# Altium PCB MainBoard.PcbDoc
Units mil, origin at the board's own origin, x right, y up, seen from the top; angles counter-clockwise.
Board outline 2226.59 x 2228.35 mil, 2 copper layers (Top Layer, Bottom Layer); 27 components, 34 nets, 217 pads, 0 vias.
Unrouted connection lines stored in the file: 60.
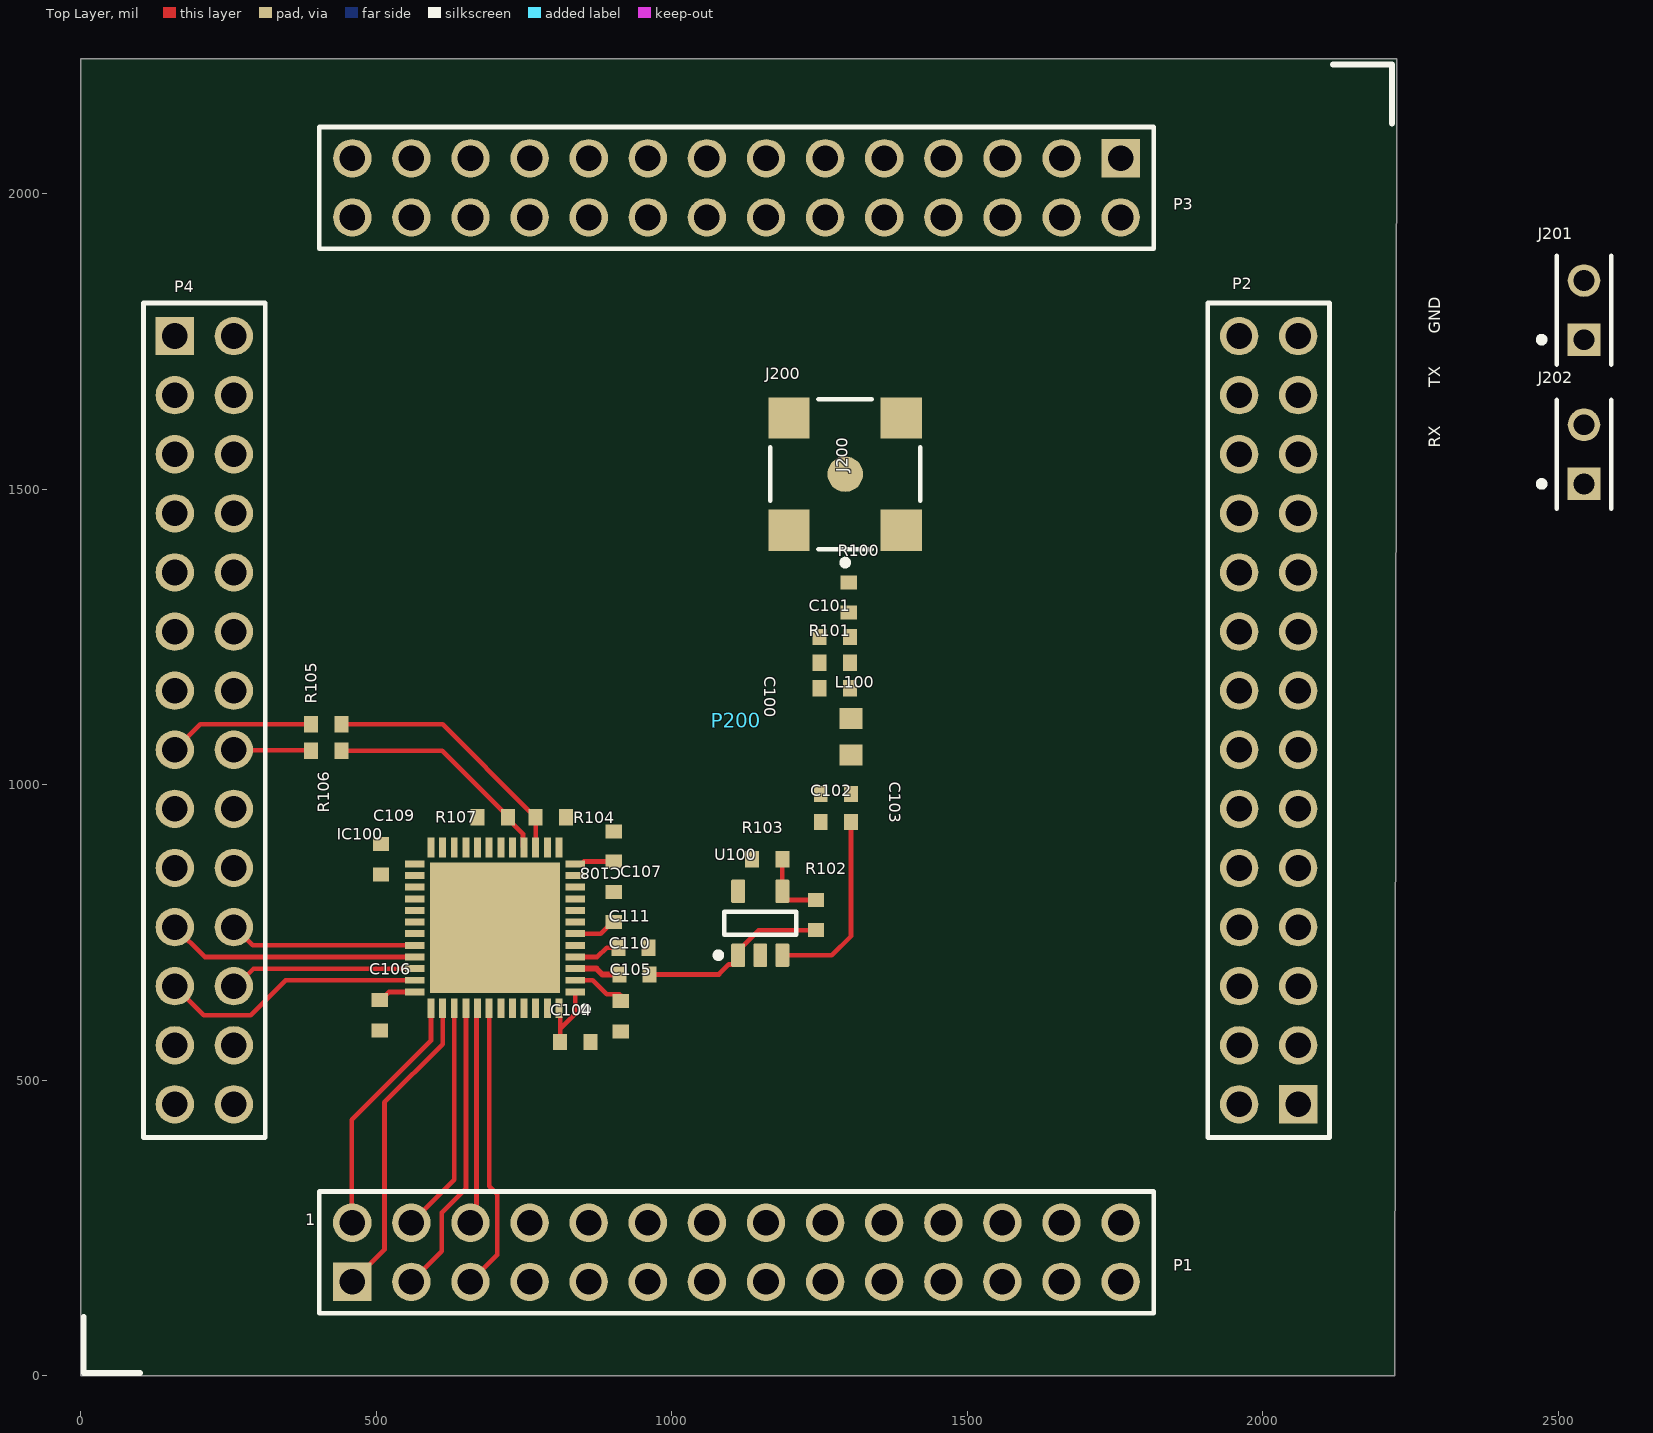
[diagram p0: Top Layer view]
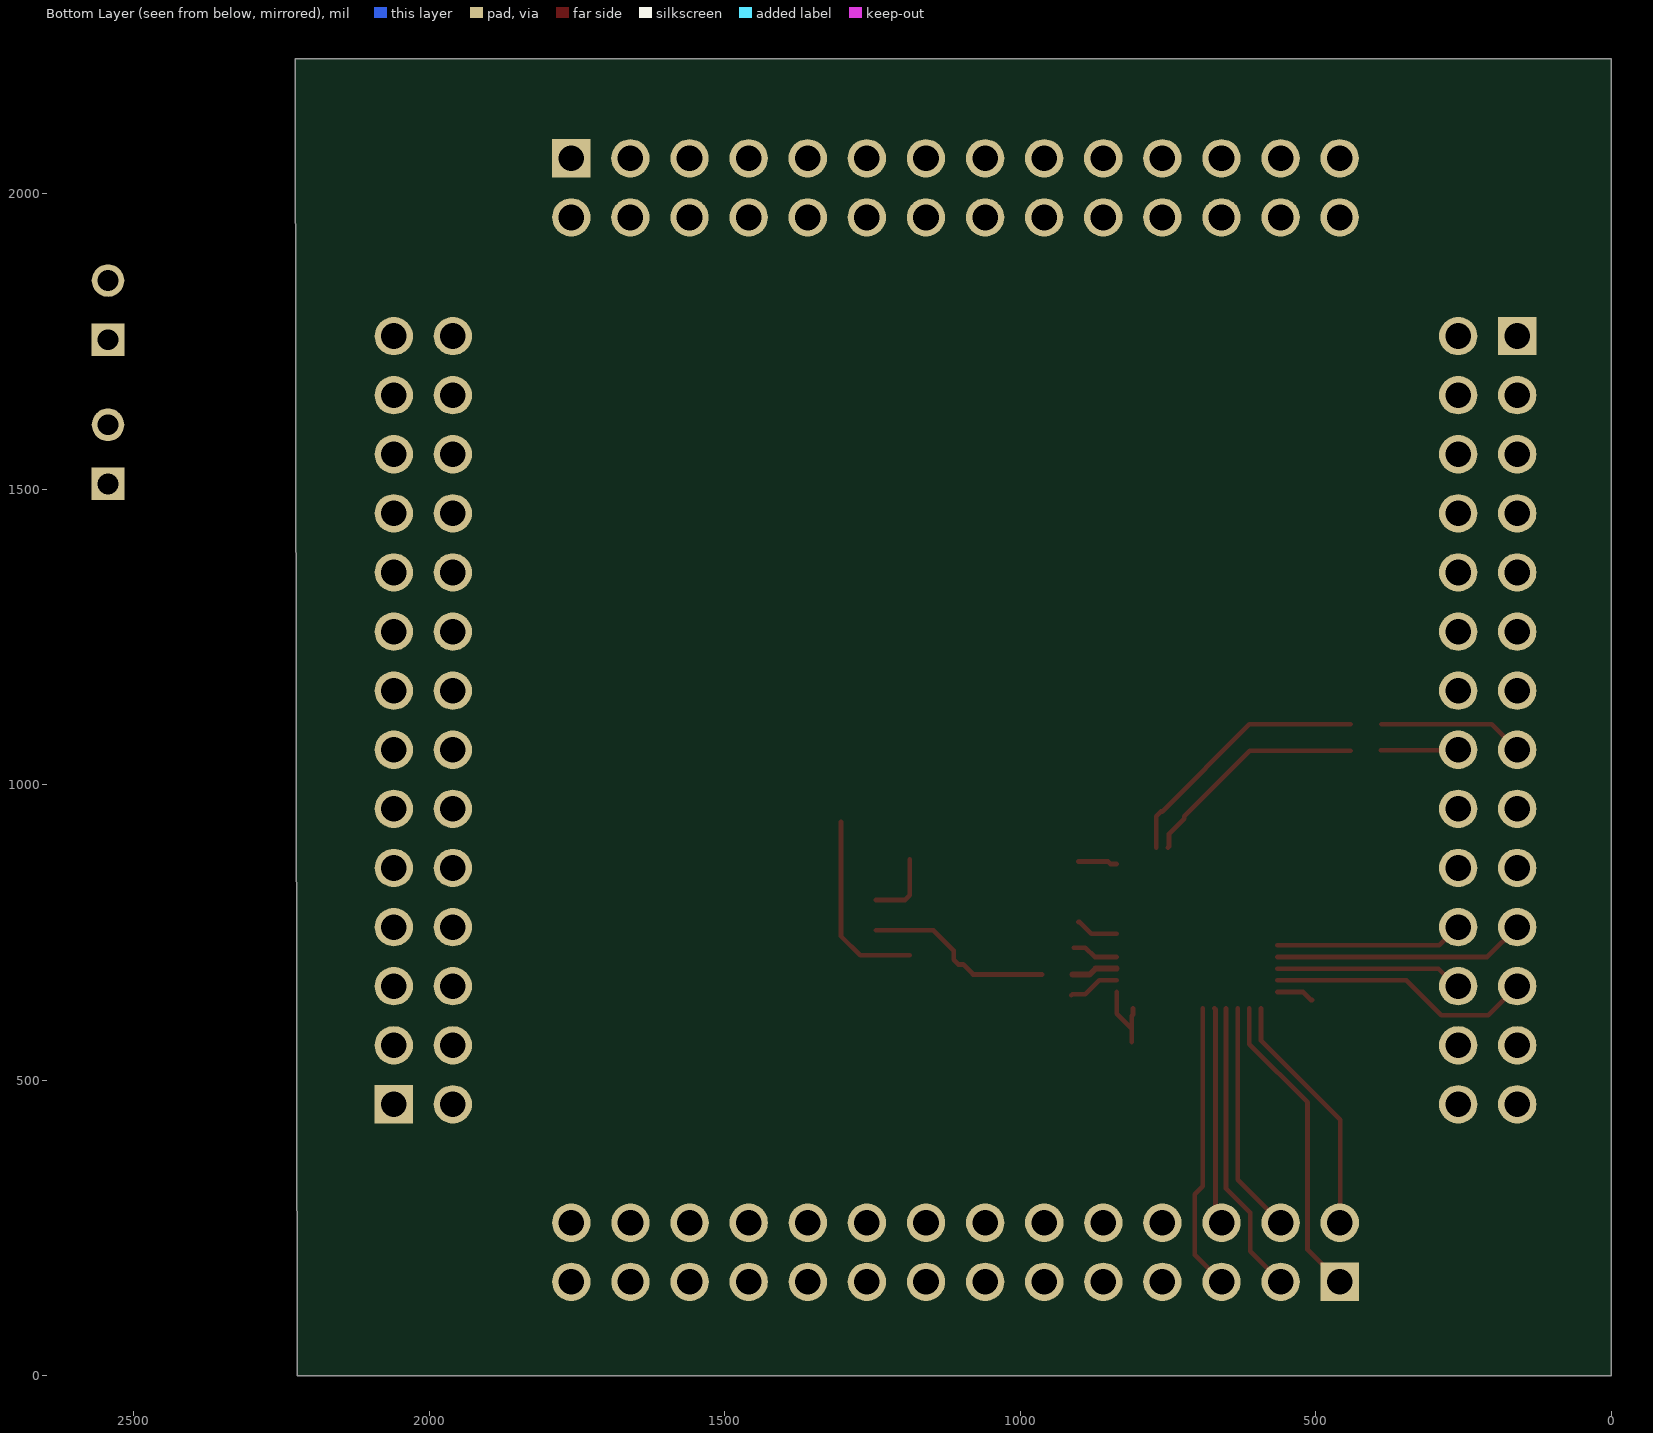
[diagram p1: Bottom Layer view, seen from below]

## Layer stack, top to bottom
Top Solder: solder mask 0.4, Solder Resist, Dk 3.5
Top Layer: signal copper 1.4
Dielectric 1: dielectric 12.6, FR-4, Dk 4.8
Bottom Layer: signal copper 1.4
Bottom Solder: solder mask 0.4, Solder Resist, Dk 3.5

## Board outline
0,0 2222.88,0 2226.59,2228.35 0,2228.35

## Design rules (kind name [scope] priority, off if disabled: settings)
Clearance [All] p1: gap=1 ignorepadtopadclearanceinfootprint=FALSE except(0: Arc-Hole Track-Hole SMDPad-Hole THPad-Hole Via-Hole Fill-Hole Poly-Hole Region-Hole Text-Hole)
MatchedLengths [InNetClass('BIT579')] p1: tolerance=3.94 checknetsindiffpair=FALSE checkdiffpairvsdiffpair=TRUE checkxsignals=TRUE checkothers=TRUE
PolygonConnect [All] p1: connectstyle=Direct reliefconductorwidth=10 reliefentries=4 polygonreliefangle="90 Angle" airgapwidth=10
RoomDefinition Computation [InComponentClass('Computation')] p1: confinementstyle=ConfineIn formatcopy=TRUE lockcomponents=FALSE outline 6045,-627.5 7780,-627.5 7780,1032.5 6045,1032.5
RoutingVias [All] p1: holewidth=28 width=50 viastyle="Through Hole" minholewidth=28 minwidth=50 maxholewidth=28 maxwidth=50
SolderMaskExpansion [All] p1: expansion=4 istentingtop=FALSE
Width [All] p1: maxlimit=100 minlimit=1 preferedwidth=10
30 further rules are at their usual default settings.

## Classes and differential pairs
net class BIT02: ADC_BIT_0 ADC_BIT_2 NetP200_18 NetP200_20
component class Connectors: J200 J201 J202 P200
net class BIT579: ADC_BIT_5 ADC_BIT_7 ADC_BIT_9
net class BIT468: ADC_BIT_4 ADC_BIT_6 ADC_BIT_8
net class BIT13: ADC_BIT_1 ADC_BIT_3
component class Computation: C100 C101 C102 C103 C104 C105 C106 C107 C108 C109 C110 C111 IC100 L100 R100 R101 R102 R103 R104 R105 R106 R107 U100

## Components (designator, comment, footprint, x,y, rotation, side; value= is the part's Value field where it differs from the comment)
C100 "0402 capacitor" 0402_FOOTPRINT 1250,1163.39 r0 top
C101 "0402 capacitor" 0402_FOOTPRINT 1250,1250 r0 top
C102 "0402 capacitor" 0402_FOOTPRINT 1251.97,937.01 r0 top
C103 "0402 capacitor" 0402_FOOTPRINT 1251.97,984.25 r0 top
C104 "0402 capacitor" 0402_FOOTPRINT 862.2,564.96 r180 top
C105 "0402 capacitor" 0402_FOOTPRINT 913.39,633.86 r270 top
C106 "0402 capacitor" 0402_FOOTPRINT 505.91,584.65 r90 top
C107 "0402 capacitor" 0402_FOOTPRINT 901.57,818.9 r270 top
C108 "0402 capacitor" 0402_FOOTPRINT 901.57,921.26 r270 top
C109 "0402 capacitor" 0402_FOOTPRINT 507.87,899.61 r270 top
C110 "0402 capacitor" 0402_FOOTPRINT 911.42,679.13 r0 top
C111 "0402 capacitor" 0402_FOOTPRINT 960.63,724.41 r180 top
IC100 "MAX19516ETM+" QFN50P700X700X80-49N 700.79,757.87 r180 top
J200 "73251-1350" FP-73251-1350-MFG 1293.31,1525.59 r90 top
J201 "5-146280-2" TECO-5-146280-2_V 2543.31,1803.14 r90 top
J202 "5-146280-2" TECO-5-146280-2_V 2543.31,1559.05 r90 top
L100 "AIML-0603-8R2K-T" INDC1608X95N 1303.15,1081.3 r270 top
P200 "FPGA_Shield_headers" FPGA_SHIELD_HEADER_FOOTPRINT 0,0 r0 top locked
R100 "0402" 0402_FOOTPRINT 1299.21,1342.52 r270 top
R101 "0402" 0402_FOOTPRINT 1250,1206.69 r0 top
R102 "0402" 0402_FOOTPRINT 1244.09,805.12 r270 top
R103 "0402" 0402_FOOTPRINT 1135.83,874.02 r0 top
R104 "0402" 0402_FOOTPRINT 769.68,944.88 r0 top
R105 "0402" 0402_FOOTPRINT 389.76,1102.36 r0 top
R106 "0402" 0402_FOOTPRINT 440.94,1057.8 r180 top
R107 "0402" 0402_FOOTPRINT 722.44,944.88 r180 top
U100 "LMH6645MF/NOPB" DBV0005A_N 1149.61,765.75 r90 top

## Footprints (in the part's own frame and the unit in brackets; to place one, negate y for a bottom-side part, rotate by r counter-clockwise, add the part's x,y. Pads: shape width x height; smd on the part's side, far side on the other; paste and mask are expansions set on the pad)
0402_FOOTPRINT [mm]
  rect 0.6x0.7 smd: 1(0,0) 2(1.3,0)
DBV0005A_N [mm] "SOT23, 5-Leads, Body 3.05x1.75mm, Pitch 0.95mm, IPC Medium Density"
  rrect17% 1x0.6 smd: 1(-1.375,0.95) 2(-1.375,0) 3(-1.375,-0.95) 4(1.375,-0.95) 5(1.375,0.95)
  silkscreen extent -1.5,-1.55 0.5,1.92, body extent -1.42,-1.46 1.42,1.46, height 1.08
FP-73251-1350-MFG [mil]
  round 60 smd paste+0 mask+0: 1(0,0)
  rect 70x70 smd paste+0 mask+0: 2(-95,95) 3(95,95) 4(-95,-95) 5(95,-95)
  silkscreen extent -155,-127 127,127, body extent -134,-134 134,134, height 10
FPGA_SHIELD_HEADER_FOOTPRINT [mm]
  rect 1.65x1.65 hole 1.1: 1(4.04,44.685) 56(44.689,52.321) 84(52.318,11.665) 85(11.666,4.04)
  round 1.65 hole 1.1: 2(6.58,44.685) 3(4.04,42.145) 4(6.58,42.145) 5(4.04,39.605) 6(6.58,39.605) 7(4.04,37.065) 8(6.58,37.065) 9(4.04,34.525) 10(6.58,34.525) 11(4.04,31.985) 12(6.58,31.985) 13(4.04,29.445) 14(6.58,29.445) 15(4.04,26.905) 16(6.58,26.905) 17(4.04,24.365) 18(6.58,24.365) 19(4.04,21.825) 20(6.58,21.825) 21(4.04,19.285) 22(6.58,19.285) 23(4.04,16.745) 24(6.58,16.745) 25(4.04,14.205) 26(6.58,14.205) 27(4.04,11.665) 28(6.58,11.665) 29(11.669,49.781) 30(11.669,52.321) 31(14.209,49.781) 32(14.209,52.321) 33(16.749,49.781) 34(16.749,52.321) 35(19.289,49.781) 36(19.289,52.321) 37(21.829,49.781) 38(21.829,52.321) 39(24.369,49.781) 40(24.369,52.321) 41(26.909,49.781) 42(26.909,52.321) 43(29.449,49.781) 44(29.449,52.321) 45(31.989,49.781) 46(31.989,52.321) 47(34.529,49.781) 48(34.529,52.321) 49(37.069,49.781) 50(37.069,52.321) 51(39.609,49.781) 52(39.609,52.321) 53(42.149,49.781) 54(42.149,52.321) 55(44.689,49.781) 57(49.778,44.685) 58(52.318,44.685) 59(49.778,42.145) 60(52.318,42.145) 61(49.778,39.605) 62(52.318,39.605) 63(49.778,37.065) 64(52.318,37.065) 65(49.778,34.525) 66(52.318,34.525) 67(49.778,31.985) 68(52.318,31.985) 69(49.778,29.445) 70(52.318,29.445) 71(49.778,26.905) 72(52.318,26.905) 73(49.778,24.365) 74(52.318,24.365) 75(49.778,21.825) 76(52.318,21.825) 77(49.778,19.285) 78(52.318,19.285) 79(49.778,16.745) 80(52.318,16.745) 81(49.778,14.205) 82(52.318,14.205) 83(49.778,11.665) 86(11.666,6.58) 87(14.206,4.04) 88(14.206,6.58) 89(16.746,4.04) 90(16.746,6.58) 91(19.286,4.04) 92(19.286,6.58) 93(21.826,4.04) 94(21.826,6.58) 95(24.366,4.04) 96(24.366,6.58) 97(26.906,4.04) 98(26.906,6.58) 99(29.446,4.04) 100(29.446,6.58) 101(31.986,4.04) 102(31.986,6.58) 103(34.526,4.04) 104(34.526,6.58) 105(37.066,4.04) 106(37.066,6.58) 107(39.606,4.04) 108(39.606,6.58) 109(42.146,4.04) 110(42.146,6.58) 111(44.686,4.04) 112(44.686,6.58)
  silkscreen extent 0.13,0.13 56.35,56.35, body extent 2.77,2.77 53.59,53.59, height 8.59
INDC1608X95N [mm]
  rect 0.9x0.97 smd: 1(-0.785,0) 2(0.785,0)
QFN50P700X700X80-49N [mm]
  rect 0.85x0.3 smd: 1(-3.45,2.75) 2(-3.45,2.25) 3(-3.45,1.75) 4(-3.45,1.25) 5(-3.45,0.75) 6(-3.45,0.25) 7(-3.45,-0.25) 8(-3.45,-0.75) 9(-3.45,-1.25) 10(-3.45,-1.75) 11(-3.45,-2.25) 12(-3.45,-2.75) 25(3.45,-2.75) 26(3.45,-2.25) 27(3.45,-1.75) 28(3.45,-1.25) 29(3.45,-0.75) 30(3.45,-0.25) 31(3.45,0.25) 32(3.45,0.75) 33(3.45,1.25) 34(3.45,1.75) 35(3.45,2.25) 36(3.45,2.75)
  rect 0.3x0.85 smd: 13(-2.75,-3.45) 14(-2.25,-3.45) 15(-1.75,-3.45) 16(-1.25,-3.45) 17(-0.75,-3.45) 18(-0.25,-3.45) 19(0.25,-3.45) 20(0.75,-3.45) 21(1.25,-3.45) 22(1.75,-3.45) 23(2.25,-3.45) 24(2.75,-3.45) 37(2.75,3.45) 38(2.25,3.45) 39(1.75,3.45) 40(1.25,3.45) 41(0.75,3.45) 42(0.25,3.45) 43(-0.25,3.45) 44(-0.75,3.45) 45(-1.25,3.45) 46(-1.75,3.45) 47(-2.25,3.45) 48(-2.75,3.45)
  rect 5.6x5.6 smd: 49(0,0)
  silkscreen extent -4,3.38 -3.75,3.62, body extent -3.55,-3.55 3.55,3.55, height 0.8
TECO-5-146280-2_V [mm] "Connector, 2-Leads, Body 4.67x2.34mm, Pitch 2.54mm"
  rect 1.4x1.4 hole 0.89: 1(-1.27,0)
  round 1.4 hole 0.89: 2(1.27,0)
  silkscreen extent -2.33,-1.17 2.33,1.94, body extent -2.34,-1.17 2.34,1.17, height 5.33

## Part data
C100 C101 C102 C103 C104 C105 C106 C107 C108 C109 C110 C111: library part Capacitor_0402
IC100: "Integrated Circuit", Manufacturer_Name="Maxim Integrated", Mouser Part Number=700-MAX19516ETM, Datasheet Link=https://datasheets.maximintegrated.com/en/ds/MAX19516.pdf, Height=0.8mm, Manufacturer_Part_Number=MAX19516ETM+, Mouser Price/Stock=https://www.mouser.co.uk/ProductDetail/Maxim-Integrated/MAX19516ETM%2b/?qs=1THa7WoU59FJ2JI%2FsSE3dA%3D%3D
J200: library part CMP-04764-000006-1, "CONN SMA JACK STR 50 OHM SMD", Frequency=18GHz, Manufacturer=Molex, Temperature="-65°C to +165°C", Temperature Range High=+165°C, Temperature Range Low=-65°C, Voltage Rating=500V, Automotive=No, Category=Conn, ComponentLink2Description=Datasheet, ComponentLink2URL=https://www.molex.com/pdm_docs/sd/732511350_sd.pdf, Conn Orientation=Straight, Contact Material=Gold, Device Class L1=Connectors, Device Class L2="RF / Coaxial Connectors", Device Class L3=unset, Digikey Description="CONN SMA JACK STR 50 OHM SMD", Footprint Url=https://forum.upverter.com/uploads/default/original/3X/d/a/daeafa2ce4908d4fc4e49f0b17d7d2c986fce444.pdf, Height=9.655mm, Impedance=50Ω, Is Female=yes, Lead Free=Yes, Manufacturer Part Number=73251-1350, Mouser Description="RF Connectors / Coaxial Connectors SMA ST PCB-JCK STD SMT", Number of Contacts=1, Octopart=https://octopart.com/73251-1350-molex-5414390, Package=73251-1350, RoHS=TRUE, Shielding=true, Standoff Height=0.41mm
J201 J202: library part CMP-2000-07492-1, "Male Header, Pitch 2.54 mm, 1 x 2 Position, Height 8.21 mm, Tail Length 3.05 mm, -65 to 105 degC, RoHS, Bulk", Case\/Package=100, Colour=Black, Current Rating=3A, Flammability Rating=UL94V-0, High Temperature Housing=Yes, Manufacturer="TE Connectivity", Max Current Rating=5A, Max Operating Temperature=105degC, Min Operating Temperature=-65degC, Package Description="Male Header, Pitch 2.54 mm, 1 x 2 Position, Height 8.21 mm, Tail Length 3.05 mm", Package Quantity=500, Approvals=CSA, Board Standoff=No(Without), Connector Type=Header, Contact Gender=Male, Contact Material=CopperAlloy, Contact Mating Length=0.23inch, Contact Plating=Matte, Contact Protection=No(Without), Contact Shape=Square, Datasheet URL=http://www.te.com/commerce/DocumentDelivery/DDEController?Action=showdoc&DocId=Customer+Drawing%7F146280%7FH1%7Fpdf%7FEnglish%7FENG_CD_146280_H1.pdf%7F5-146280-2, Datasheet Version="Rev. H1, 08/2016", Depth=2.34mm, Gasket=No(Without), High Speed Serial Data Connector=No, Housing Colour=Black, Housing Material=Polymer, Keyed=No, Length=4.67mm, Manufacturer URL=http://www.te.com/, Mating Alignment=No(Without), Mating Connector Lock=No(Without), Mating Post Length=0.23inch, Mount=ThroughHole, Mounting Technology=ThroughHole, Number of Contacts=2, Number of Positions=2, Number of Rows=1, Orientation=Straight, Package Reference=5-146280-2, Packaging=Carton, Panel Mount Retention=No(Without), PCB Mount Retention=Without, PCB Mounting Orientation=Vertical, PCB Thickness=0.063inch, Pitch=2.54mm, Radiation Hardening=No, RoHSCompliant=true, Row Spacing=2.54mm, Selectively Loaded=No(Without), Stabilizers=No(Without), Termination=ThroughHole, Termination Post Length=0.12inch
L100: "8.2 ÂµH Shielded Multilayer Inductor 4 mA 2.1Ohm Max 0603 (1608 Metric)", Package="1608 Taiyo Yuden", Availability="In Stock", Check_prices=https://www.snapeda.com/parts/AIML-0603-8R2K-T/Abracon/view-part/?ref=eda, MF=Abracon, MP=AIML-0603-8R2K-T, Price=None, Purchase-URL=https://pricing.snapeda.com/search/part/AIML-0603-8R2K-T/?ref=eda, SnapEDA_Link=https://www.snapeda.com/parts/AIML-0603-8R2K-T/Abracon/view-part/?ref=snap
R100 R101 R102 R103 R104 R105 R106 R107: library part Resistor_0402
U100: library part CMP-0055-01245-3, "2.7V, 650uA, 65MHz, Rail-to-Rail Input and Output Amplifiers with Shutdown Option, 5-pin SOT-23, Pb-Free", Manufacturer="Texas Instruments", Package Reference=DBV0005A, PackageTopMarking=A68A*XTT, PowerWise=Y, ComponentLink1Description="Datasheet URL", ComponentLink1URL=http://www.ti.com/general/docs/lit/getliterature.tsp?genericPartNumber=LMH6645&fileType=pdf, CompType=Amplifiers, PackageDescription="Molded SOT-23, .115 x .063 x .040 in Body, 5 Lead, .0375 in Pitch", PinCount=5, RoHS=Y

## Nets (pads, with @x,y where several pads share a name; then routed paths per layer and width w, separated by ;. In a path a pad name is that pad's centre, name@x,y a point inside that pad or via, vN(x,y) a via of type N, cw(c..) or ccw(c..) an arc to the next point about the centre after c; other vN are vias at no path point)
3V3: C104.2 C106.2 C108.2 C109.2 IC100.1 IC100.12 IC100.13 IC100.25 IC100.36 IC100.48 P200.27 P200.28 P200.29 P200.57 P200.111 P200.112 U100.5 | length 262.4
  Top Layer w8: C106.2 507.87,635.83 521.65,649.61 IC100.36 ; IC100.48 809.06,611.22 811.02,609.25 811.02,587.11 ; C104.2 811.02,587.11 ; IC100.1 836.61,612.7 811.02,587.11 ; IC100.12 847.44,866.14 851.38,870.08 C108.2
ADC_BIT_0: IC100.32 P200.22 | length 318.7
  Top Layer w8: P200.22 260.15,759.25 291.05,728.35 IC100.32
ADC_BIT_1: IC100.33 P200.21 | length 426.9
  Top Layer w8: P200.21 209.65,708.66 IC100.33
ADC_BIT_2: IC100.34 P200.24 | length 318.2
  Top Layer w8: P200.24 262.51,659.25 292.24,688.98 IC100.34
ADC_BIT_3: IC100.35 P200.23 | length 450.7
  Top Layer w8: P200.23 208.07,610.24 287.4,610.24 346.46,669.29 IC100.35
ADC_BIt_4: IC100.37 P200.86 | length 418.7
  Top Layer w8: P200.86 458.66,259.69 458.66,433.07 592.52,566.93 IC100.37
ADC_BIT_5: IC100.38 P200.85 | length 526.3
  Top Layer w8: P200.85 513.78,213.54 513.78,462.6 612.2,561.02 IC100.38
ADC_BIT_6: IC100.39 P200.88 | length 393.1
  Top Layer w8: P200.88 631.89,331.65 IC100.39
ADC_BIT_7: IC100.40 P200.87 | length 501.2
  Top Layer w8: P200.87 610.88,210.65 610.88,276.24 651.57,316.93 IC100.40
ADC_BIT_8: IC100.41 P200.90 | length 367.9
  Top Layer w8: P200.90 669.35,269.12 669.35,620.14 IC100.41
ADC_BIT_9: IC100.42 P200.89 | length 487.5
  Top Layer w8: P200.89 704.72,204.49 704.72,307.09 690.94,320.87 IC100.42
ADC_CLK+: P200.16 R106.2 | length 131
  Top Layer w8: P200.16 259.78,1058.52 R106.2@389.76,1058.52
ADC_CLK-: P200.15 R105.1 | length 247.7
  Top Layer w8: P200.15 202.17,1102.36 R105.1@388.85,1102.36
ADC_DCLK: IC100.44
ADC_DOR: IC100.43
ADC_IN_+: C110.1 IC100.3 | length 78.9
  Top Layer w10: IC100.3 872.58,688.98 882.42,679.13 C110.1
ADC_IN_-: C111.2 IC100.4 | length 79.4
  Top Layer w8: IC100.4 874.02,708.66 889.76,724.41 C111.2
ADC_SHDN: IC100.7
ADC_SYNC: IC100.14
ANALOG_IN: J200.1 R100.1
GND: C100.1 C101.1 C102.1 C103.1 C104.1 C105.2 C106.1 C107.1 C108.1 C109.1 C111.1 IC100.5 IC100.17 IC100.18 IC100.49 J200.2 J200.3 J200.4 J200.5 J202.1 P200.1 P200.2 P200.8 P200.9 P200.10 P200.25 P200.26 P200.30 P200.31 P200.55 P200.56 P200.58 P200.59 P200.83 P200.84 P200.109 P200.110 R101.1 R103.1 R104.2 R107.2 U100.2
NetC100_2: C100.2 C101.2 L100.1 R100.2 R101.2
NetC105_1: C105.1 IC100.2 | length 87.4
  Top Layer w8: IC100.2 866.14,669.29 889.76,645.67 911.42,645.67 C105.1@913.39,643.7
NetC107_2: C107.2 IC100.6 | length 73.1
  Top Layer w8: IC100.6 879.92,748.03 899.61,767.72 C107.2
NetC110_2: C110.2 R102.2 U100.1 | length 321.7
  Top Layer w8: C110.2 1079.72,679.13 1096.56,695.97 1104.39,695.97 1112.2,703.78 1112.2,719.49 1146.65,753.94 R102.2
NetIC100_15: IC100.15 R104.1 R105.2 | length 446.3
  Top Layer w8: R105.2 612.2,1102.36 759.91,954.66 761.87,954.66 769.68,946.85 R104.1 IC100.15
NetIC100_16: IC100.16 R106.1 R107.1 | length 392
  Top Layer w8: R106.1 611.5,1057.8 722.44,946.85 R107.1 722.44,942.91 748.09,917.26 748.09,895.61 IC100.16
OP_AMP_IN+: C102.2 C103.2 L100.2 U100.3 | length 322.5
  Top Layer w8: U100.3 1270.67,711.61 1303.15,744.09 C102.2
OP_AMP_IN-: R102.1 R103.2 U100.4 | length 121.4
  Top Layer w8: R103.2 U100.4 1187.01,812.93 1194.82,805.12 R102.1
SPI_CS: IC100.47
SPI_SCLK: IC100.46
SPI_SDIN: IC100.45
UART_RX: J201.1
UART_TX: J201.2
pads on no net: IC100.8 IC100.9 IC100.10 IC100.11 IC100.19 IC100.20 IC100.21 IC100.22 IC100.23 IC100.24 IC100.26 IC100.27 IC100.28 IC100.29 IC100.30 IC100.31 J202.2 P200.3 P200.4 P200.5 P200.6 P200.7 P200.11 P200.12 P200.13 P200.14 P200.17 P200.18 P200.19 P200.20 P200.32 P200.33 P200.34 P200.35 P200.36 P200.37 P200.38 P200.39 P200.40 P200.41 P200.42 P200.43 P200.44 P200.45 P200.46 P200.47 P200.48 P200.49 P200.50 P200.51 P200.52 P200.53 P200.54 P200.60 P200.61 P200.62 P200.63 P200.64 P200.65 P200.66 P200.67 P200.68 P200.69 P200.70 P200.71 P200.72 P200.73 P200.74 P200.75 P200.76 P200.77 P200.78 P200.79 P200.80 P200.81 P200.82 P200.91 P200.92 P200.93 P200.94 P200.95 P200.96 P200.97 P200.98 P200.99 P200.100 P200.101 P200.102 P200.103 P200.104 P200.105 P200.106 P200.107 P200.108

## Silkscreen, mask and mechanical layers (free items; w line width, h text height)
Top Overlay:
  text "GND" at 2300.15,1762.84 h20 r90
  text "TX" at 2300.15,1672.29 h20 r90
  text "RX" at 2300.15,1569.93 h20 r90

## Text inside footprints (layer, text, board x,y; h text height)
P200: Top Overlay "P3" at 1848,1973 h20; Top Overlay "P1" at 1848,178 h20; Top Overlay "P2" at 1948,1838 h20; Top Overlay "P4" at 158,1833 h20; Top Overlay "1" at 380,255 h20